# Altium PCB PCB1.PcbDoc (part 9 of 9)
Units mm, origin at the board's own origin, x right, y up, seen from the top; angles counter-clockwise.
Board outline 227 x 102 mm, 4 copper layers (Top Layer, MidLayer1, MidLayer2, Bottom Layer); 425 components, 426 nets, 1455 pads, 440 vias.
Unrouted connection lines stored in the file: 2.
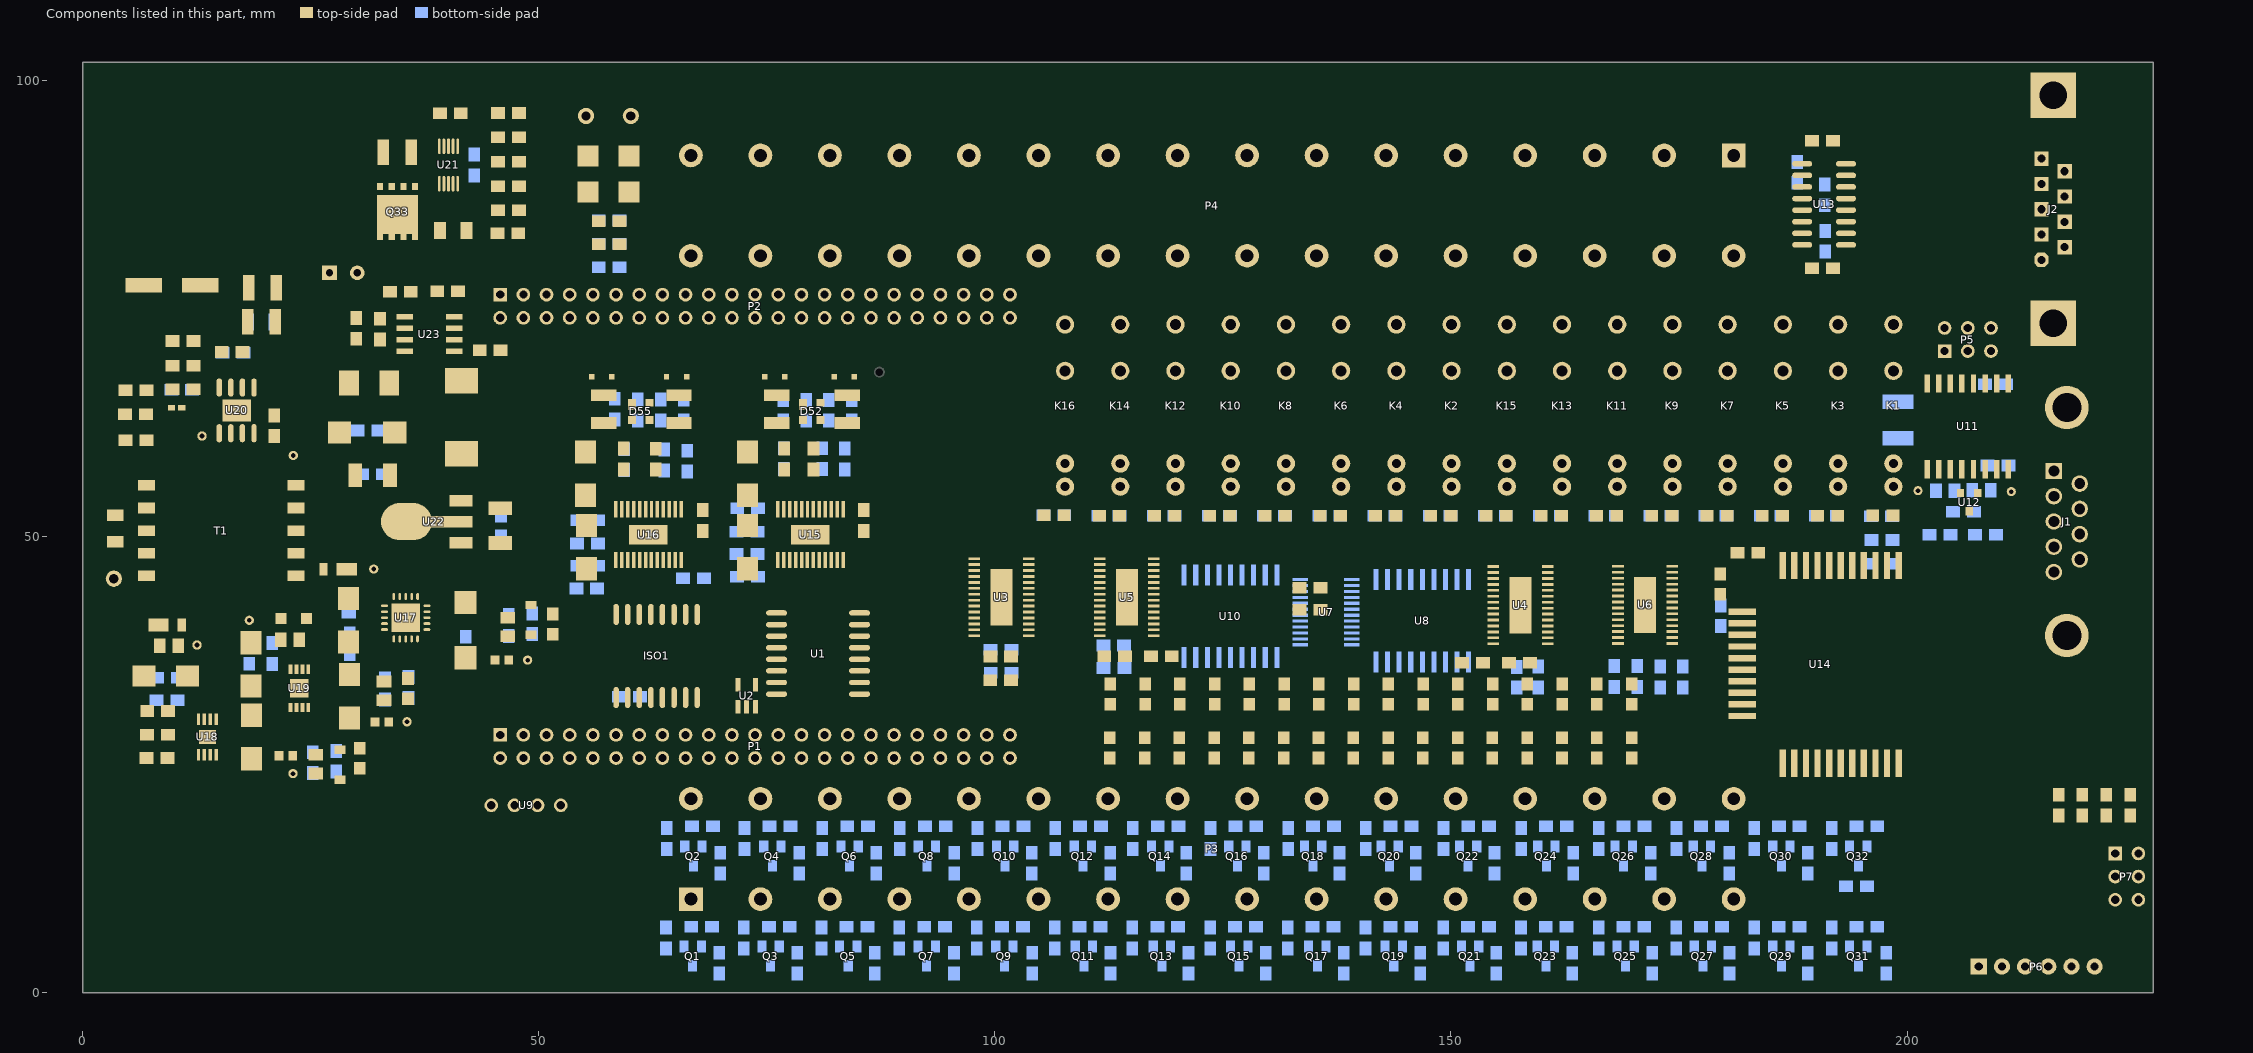
[diagram p11: the components of this part, seen from the top]

## Polygon pours and split planes (outlines as drawn) (continued)
GND_SIG on MidLayer1 "Top Layer-No Net 1" (solid, remove dead copper, pour order 1000): 213.166,63.838 217.086,67.758 223.768,67.758 224.711,66.815 224.711,37.535 223.62,36.444 215.134,36.444 214.522,37.056 214.522,46.849 212.801,48.57 202.66,48.57 200.891,50.339 200.891,59.207 200.032,60.066 197.649,60.066 197.214,60.501 197.214,63.188 197.864,63.838
DGND on MidLayer1 "Top Layer-No Net 1" (solid, remove dead copper, pour order 1000): 0.459,51.136 0.459,100.459 1.469,101.469 90.789,101.469 91.096,101.162 91.652,100.606 91.652,84.149 91.652,72.722 89.796,70.866 52.975,70.866 51.314,69.205 51.151,69.042 51.151,64.647 51.151,47.588 50.304,46.741 35.003,46.741 32.268,49.476 31.422,50.322 28.491,50.322 25.854,50.322 24.91,51.266 24.91,57.582 24.063,58.429 7.167,58.429 6.776,58.038 6.776,51.592 6.385,51.201 5.799,50.615 1.045,50.615 0.98,50.615 0.459,51.136
GND_SIG on MidLayer1 "Top Layer-No Net 1" (solid, remove dead copper, pour order 1001): 88.032,68.458 88.032,46.805 85.756,44.529 72.58,44.529 70.498,42.447 70.498,39.224 69.859,38.585 58.388,38.585 49.841,30.038 41.561,30.038 35.94,24.417 35.94,1.506 34.953,0.519 1.573,0.519 0.543,1.549 0.543,45.225 2.689,47.371 5.863,47.371 6.807,46.427 6.807,43.682 7.58,42.909 22.468,42.909 23.54,43.981 23.54,48.959 24.183,49.602 30.662,49.602 34.389,45.875 50.876,45.875 52.158,47.157 52.158,68.18 53.745,69.767 86.723,69.767
V3_3D on MidLayer2 "Top Layer-No Net 1" (solid, pour order 1005): 215.784,25.945 225.973,25.945 226.594,25.324 226.594,1.182 225.724,0.312 204.836,0.312 204.195,0.953 204.195,6.91 205.139,7.854 206.354,7.854 209.172,10.672 209.172,19.698 210.691,21.217 213.728,21.217 214.774,22.263 214.774,24.935
+5V_ISO on MidLayer2 "Top Layer-No Net 1" (solid, remove dead copper, pour order 1003): 201.319,63.843 213.16,63.843 216.5,67.183 217.098,67.781 223.764,67.781 224.721,66.824 224.721,65.838 224.721,37.53 223.615,36.424 215.574,36.424 214.617,37.381 214.617,46.708 212.794,48.531 202.72,48.531 201.644,49.607 201.644,61.115 200.688,62.071 200.692,62.075 200.692,63.338 201.197,63.843 201.319,63.843
VCC24V on MidLayer2 "Top Layer-No Net 1" (solid, remove dead copper, pour order 1001): 62.83,22.72 62.83,0.67 63.39,0.11 198.44,0.11 199.25,0.92 199.25,23.31 198.2,24.36 64.47,24.36 62.83,22.72
V3_3D on MidLayer2 "Top Layer-No Net 1" (solid, remove dead copper, pour order 1004): 225.62,101.156 225.62,71.013 223.963,69.356 215.89,69.356 212.301,65.767 200.963,65.767 198.942,63.746 198.942,49.215 197.745,48.018 185.833,48.018 180.745,42.93 168.537,42.93 168.537,94.654 175.039,101.156
V3_3D on MidLayer2 "Top Layer-No Net 1" (solid, remove dead copper, pour order 1001): 52.907,30.071 103.062,30.071 104.107,29.026 104.107,25.513 104.641,24.979 180.652,24.979 181.268,25.595 181.268,94.927 175.039,101.156 51.634,101.156 41.959,91.481 41.959,62.775 39.044,59.86 27.277,59.86 24.913,57.496 24.913,51.498 25.894,50.517 31.199,50.517 35.006,46.71 50.174,46.71 51.155,47.691 51.155,69.203 52.943,70.991 87.894,70.991 89.336,69.549 89.336,46.077 86.913,43.654 73.244,43.654 71.687,42.097 71.687,36.272 70.591,35.176 56.807,35.176 52.787,31.156 52.787,30.191
-15V_ISO on MidLayer2 "Top Layer-No Net 1" (solid, remove dead copper, pour order 1002): 86.721,69.749 88.026,68.444 88.026,46.832 85.729,44.535 72.515,44.535 70.402,42.422 70.402,39.182 69.403,38.183 57.949,38.183 49.856,30.09 41.586,30.09 35.926,24.43 35.926,1.532 35.007,0.613 1.504,0.613 0.592,1.525 0.592,41.543 1.494,42.445 30.944,42.445 34.217,45.718 50.834,45.718 52.195,47.079 52.195,68.165 53.779,69.749
VCC24V on Bottom Layer "Top Layer-No Net 1" (solid, pour order 1008): 57.11,78.8 53.37,78.8 52.58,79.59 52.58,85.23 53.03,85.68 57.16,85.68 57.42,85.42 57.42,79.11 57.11,78.8
DGND on Bottom Layer "Top Layer-No Net 1" (solid, pour order 1007): 58.05,85.85 58.05,79.02 58.39,78.68 83.01,78.68 83.77,79.44 83.77,83.54 83.75,83.56 83.03,84.28 82.36,84.28 61.99,84.28 60.2,86.07 58.27,86.07 58.05,85.85
-15V_ISO on Bottom Layer "Top Layer-No Net 1" (solid, pour order 1002): 58.99,53.24 58.99,51.1 58.19,50.3 58.19,47.49 59.12,46.56 66.22,46.56 66.73,47.07 66.73,53.04 66.19,53.58 59.33,53.58
-15V_ISO on Bottom Layer "Top Layer-No Net 1" (solid, pour order 1003): 76.438,53.392 76.438,47.612 76.87,47.18 83.71,47.18 84.34,47.81 84.34,52.98 83.67,53.65 76.697,53.65

## Keep-outs
Keep-Out Layer:
  circle w0.3: c19,14 r2
  circle w0.3: c204,14 r2
  circle w0.3: c204,89 r2
  circle w0.3: c19,89 r2
  lines w0.254: 0,0 227,0 227,102 0,102 0,0

## Other copper
Top Layer:
  rectangle net V3_3D: 44.47,52.6 50,55.99
MidLayer1:
  rectangle net GND_SIG: 33.34,38.759 38.074,43.188

## Silkscreen, mask and mechanical layers (free items; w line width, h text height)
Top Overlay:
  circle w0.3: c204,89 r4
  circle w0.3: c204,14 r4
  circle w0.3: c19,14 r4
  circle w0.3: c19,89 r4

## Text inside footprints (layer, text, board x,y; h text height)
J1: Top Overlay "1" at 212.776,58.538 h0.9 r270; Top Overlay "5" at 212.674,46.549 h0.9 r270; Top Overlay "9" at 222.025,48.025 h0.9 r270; Top Overlay "6" at 222.025,56.335 h0.9 r270
J2: Top Overlay "9" at 216.992,92.895 h0.9 r270; Top Overlay "5" at 213.69,93.657 h0.9 r270; Top Overlay "6" at 216.992,79.56 h0.9 r270; Top Overlay "1" at 213.69,78.925 h0.9 r270
L5: Top Overlay "GS" at 42.09,62.45 h0.9 r90
P1: Bottom Overlay "45" at 103.311,28.798 h0.9 r180; Bottom Overlay "46" at 103.311,26.258 h0.9 r180; Bottom Overlay "1" at 43.24,28.798 h0.9 r180; Bottom Overlay "2" at 43.24,26.258 h0.9 r180
P2: Bottom Overlay "45" at 103.311,77.058 h0.9 r180; Bottom Overlay "46" at 103.311,74.518 h0.9 r180; Bottom Overlay "1" at 43.24,77.058 h0.9 r180; Bottom Overlay "2" at 43.24,74.518 h0.9 r180
P5: Top Overlay "6" at 210.7,72.96 h0.9; Top Overlay "5" at 210.714,69.852 h0.9; Top Overlay "2" at 201.95,73.02 h0.9; Top Overlay "1" at 202.078,69.852 h0.9
P7: Top Overlay "6" at 224.842,8.696 h0.9 r270; Top Overlay "5" at 222.302,8.696 h0.9 r270; Top Overlay "2" at 224.842,17.84 h0.9 r270; Top Overlay "1" at 222.302,17.332 h0.9 r270
U15: Mechanical 5 "*" at 75.65,48.294 h0.9
U16: Mechanical 5 "*" at 57.9,48.294 h0.9